# Altium PCB PCB1.PcbDoc
Units mm, origin at the board's own origin, x right, y up, seen from the top; angles counter-clockwise.
Board outline 31.73 x 45.8 mm, 2 copper layers (Component Side, Bottom Layer), stack 1.571 mm thick; 19 components, 20 nets, 57 pads, 12 vias.
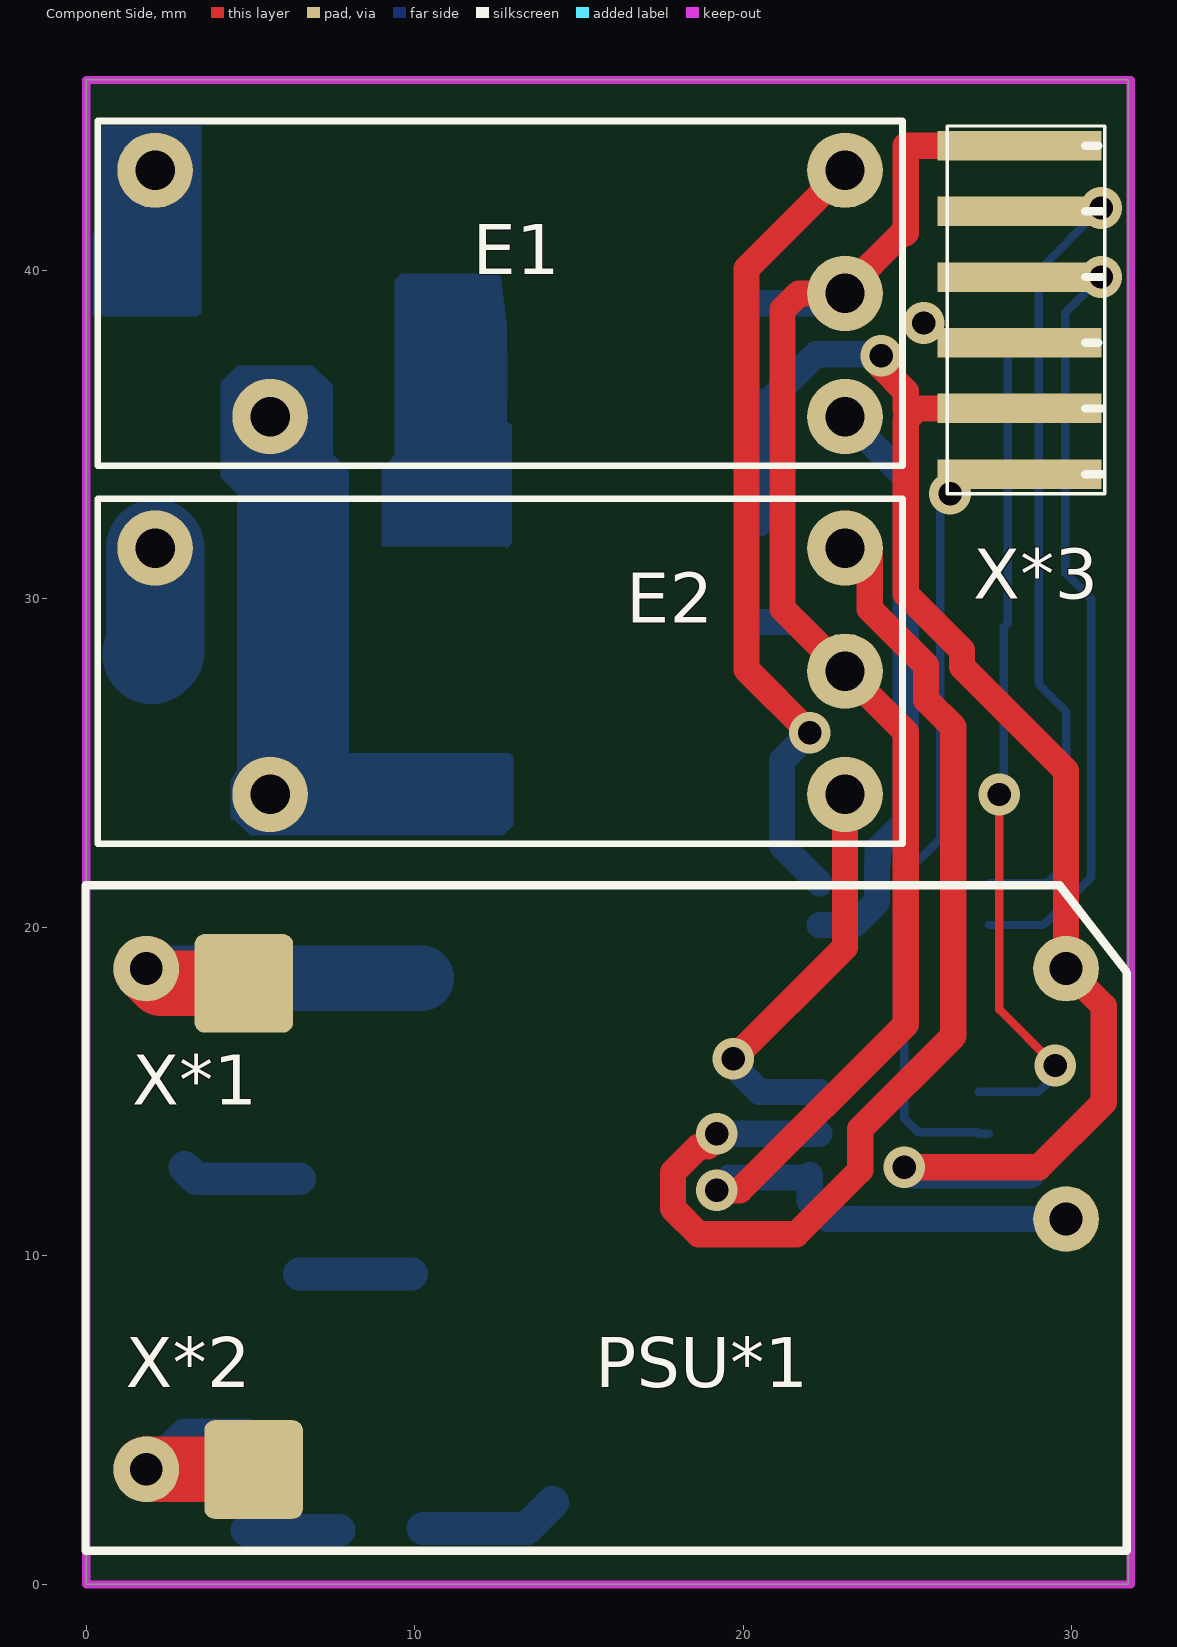
[diagram p0: Component Side view]
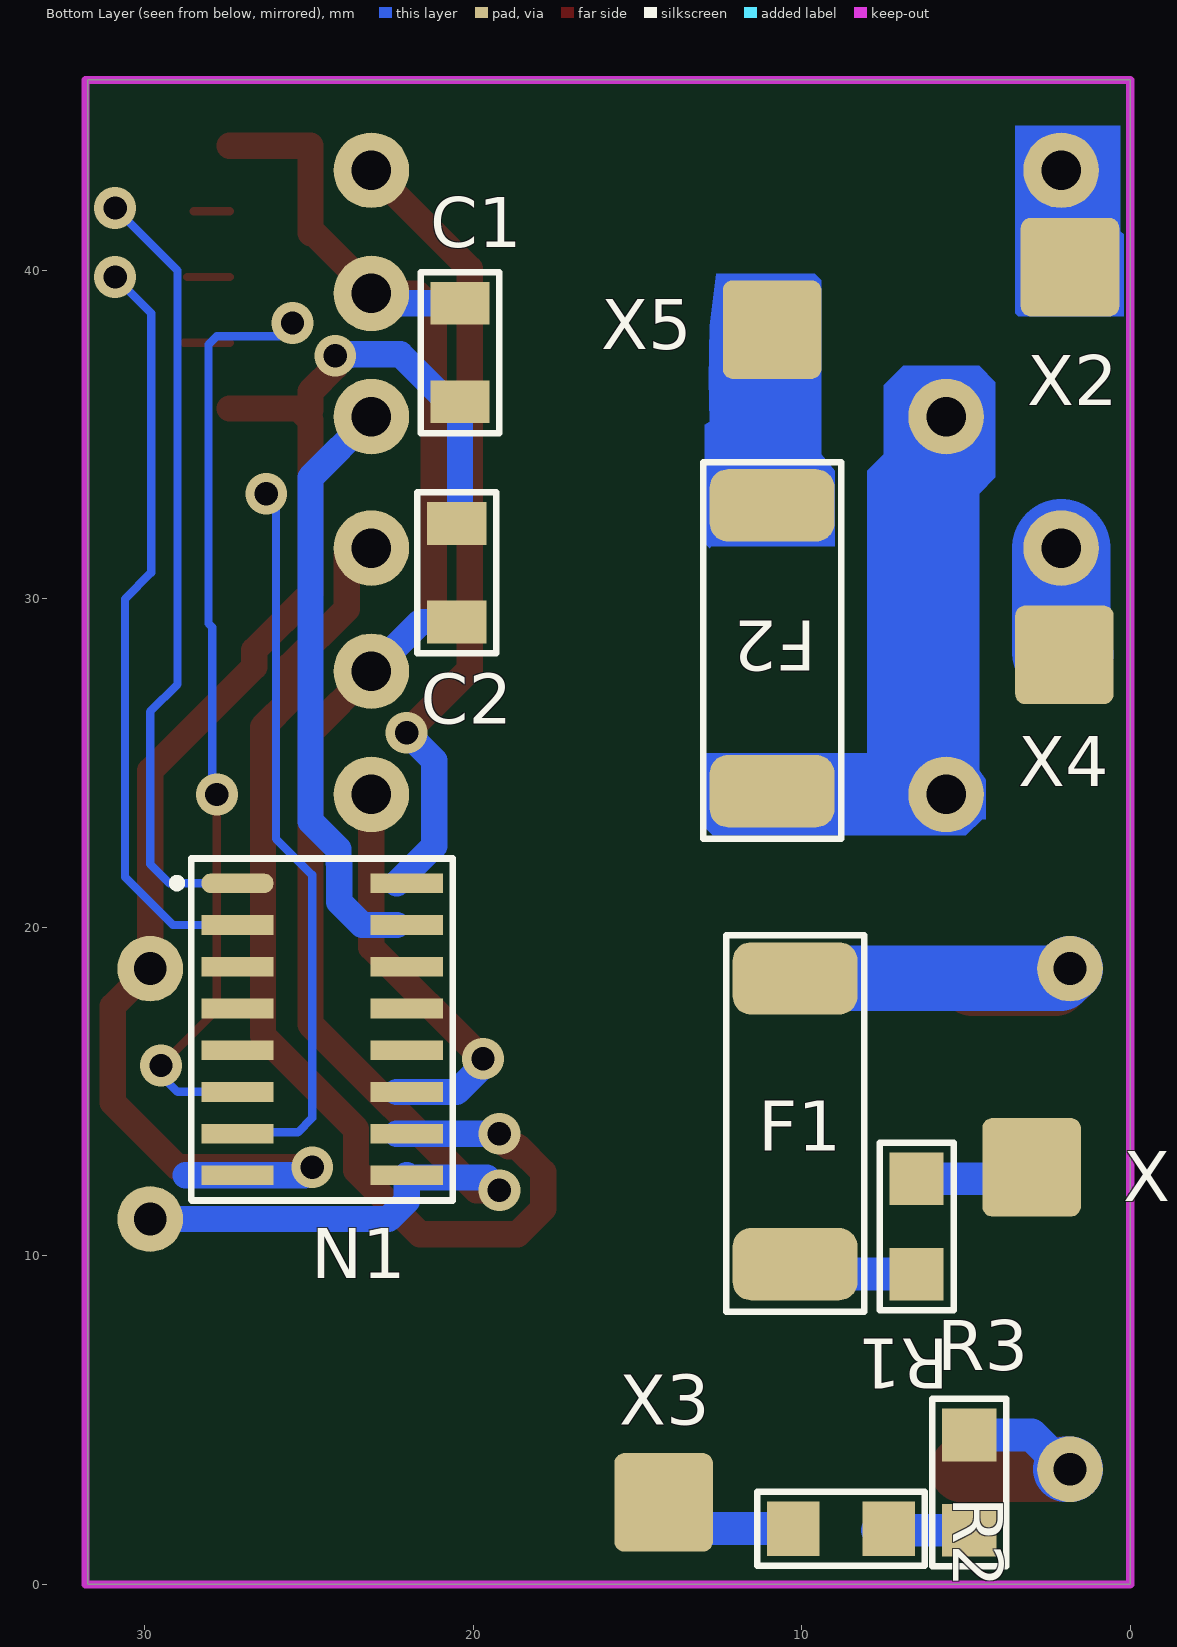
[diagram p1: Bottom Layer view, seen from below]
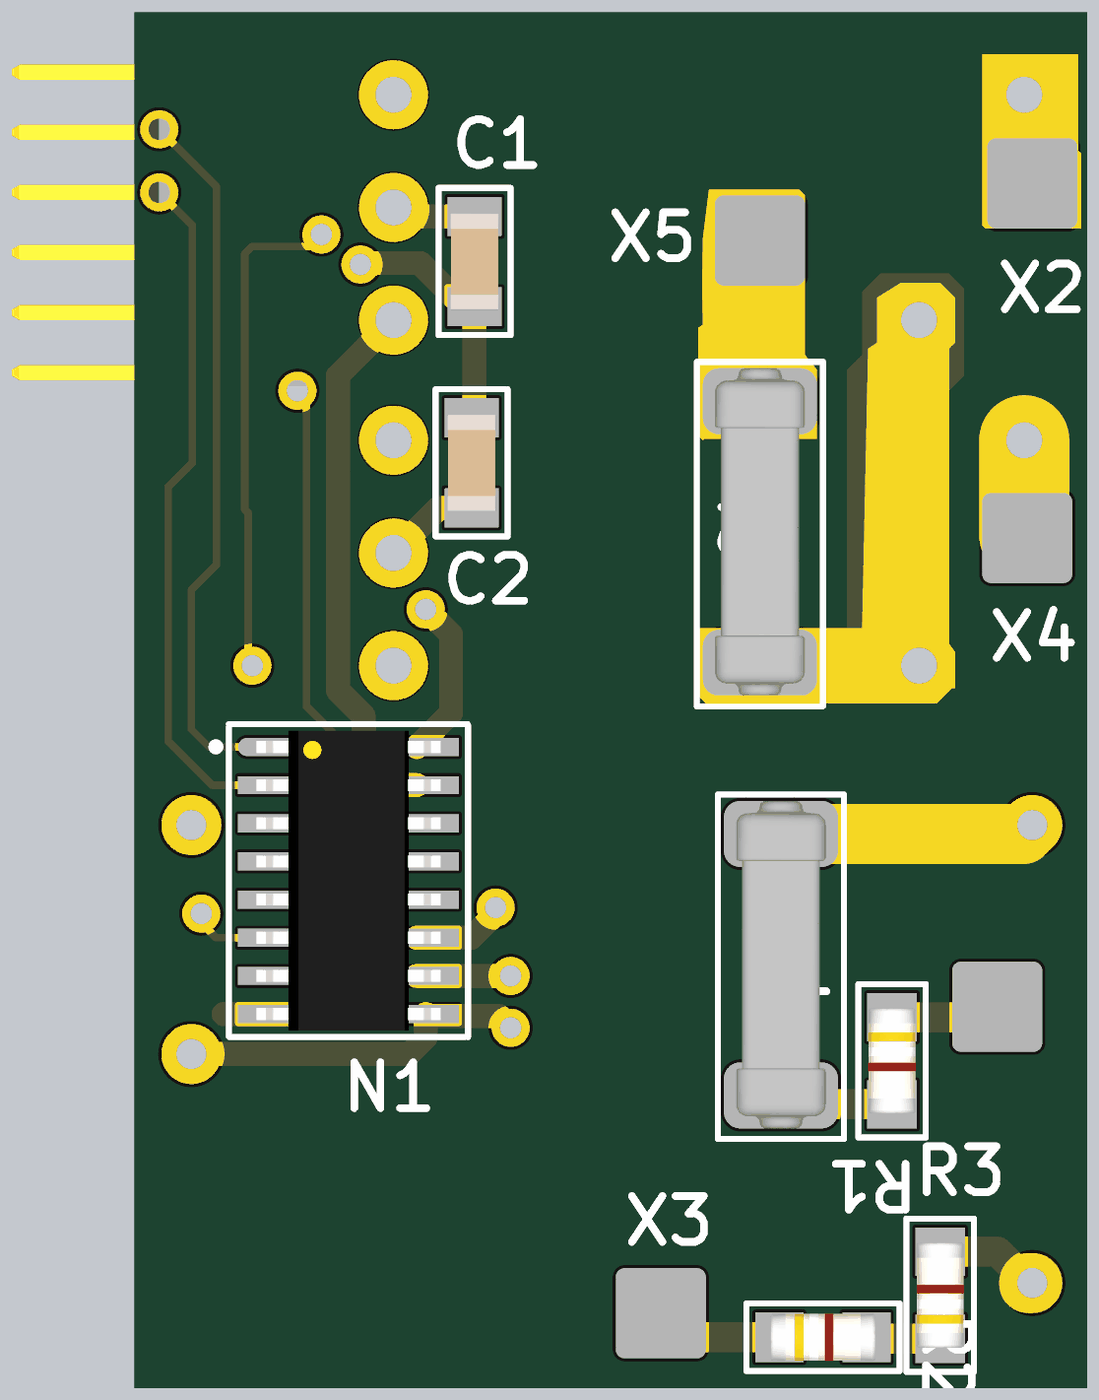
[diagram p2: 3D render of the assembled board from below, using the file's embedded part models]

## Layer stack, top to bottom
Top Solder: solder mask 0.0102, Solder Resist, Dk 3.5
Component Side: signal copper 0.0356
Dielectric 1: core 1.5, FR-4, Dk 4.2
Bottom Layer: signal copper 0.0356
Solder Side: solder mask 0.0187, Solder Resist, Dk 3.5

## Board outline
0,0 31.73,0 31.73,45.8 0,45.8

## Design rules (kind name [scope] priority, off if disabled: settings)
Clearance [All] p1: gap=0.3
PolygonConnect [All] p1: connectstyle=Relief reliefconductorwidth=0.254 reliefentries=4 polygonreliefangle="90 Angle" airgapwidth=0.254
RoomDefinition Sheet1 [InComponentClass('Sheet1')] p1: confinementstyle=ConfineIn formatcopy=TRUE lockcomponents=FALSE outline -55.589,-76.52 -4.789,-76.52 -4.789,-51.12 -55.589,-51.12
RoutingVias [All] p1: holewidth=0.6 width=1 viastyle="Through Hole" minholewidth=0.711 minwidth=1.27 maxholewidth=0.711 maxwidth=1.27
SolderMaskExpansion [All] p1: expansion=0.102
Width Width_1 [InNetClass('2mm')] p1: maxlimit=5 minlimit=1 preferedwidth=2
Width Width_2 [InNetClass('0.8mm')] p2: maxlimit=1 minlimit=0.5 preferedwidth=0.8
Width [All] p3: maxlimit=0.254 minlimit=0.254 preferedwidth=0.254
30 further rules are at their usual default settings.

## Classes and differential pairs
net class 0.8mm: 12V GND NetE1_1 NetE1_6 NetE2_1 NetE2_6
net class 2mm: NetE1_3 NetE1_5 NetE2_3 NetF1_1 NetF1_2 NetF2_2 NetPSU*1_2 NetR1_1 NetR2_1 NetR2_2

## Components (designator, comment, footprint, x,y, rotation, side; value= is the part's Value field where it differs from the comment)
C1 "10nF/500V" CAP_1206_IPC_B 20.4,37.5 r90 bottom
C2 "10nF/500V" CAP_1206_IPC_B 20.5,30.8 r270 bottom
E1 "ADW1212W" RELAIS_PANASONIC_ADW1212W 12.6,39.3 r180 top
E2 "ADW1212W" RELAIS_PANASONIC_ADW1212W 12.6,27.8 r180 top
F1 "1.25A/250V" Fuse 10.2,14.1 r90 bottom
F2 "1.25A/250V" Fuse 10.9,28.5 r90 bottom
N1 "ULN2003D" SOP127P720X175-16N 24.6,16.9 r180 bottom
PSU*1 "PSU Module" RAC02-GB 1.831,3.506 r0 top
R1 "1k/0.1%" RES_MiniMELF_3514N 6.5,10.9 r270 bottom
R2 "1k/0.1%" RES_MiniMELF_3514N 8.8,1.7 r180 bottom
R3 "1k/0.1%" RES_MiniMELF_3514N 4.9,3.1 r90 bottom
X1 "1 PIN" 1p 3,12.7 r180 bottom
X2 "1 PIN" 1p 1.831,40.1 r180 bottom
X3 "1 PIN" 1p 14.2,2.5 r180 bottom
X4 "1 PIN" 1p 2,28.3 r180 bottom
X5 "1 PIN" 1p 10.9,38.2 r180 bottom
X*1 "1 PIN" 1p 4.8,18.3 r0 top
X*2 "1 PIN" 1p 5.1,3.5 r0 top
X*3 "1x6p" M22-5330605 27.41,33.8 r90 top locked

## Footprints (in the part's own frame and the unit in brackets; to place one, negate y for a bottom-side part, rotate by r counter-clockwise, add the part's x,y. Pads: shape width x height; smd on the part's side, far side on the other; paste and mask are expansions set on the pad)
1p [mm]
  rrect20% 3x3 smd: 1(0,0)
CAP_1206_IPC_B [mm]
  rect 1.3x1.8 smd: 1(-1.5,0) 2(1.5,0)
  silkscreen extent -2.45,-1.2 2.45,1.2, body extent -2.15,-0.9 2.15,0.9, height 0.79
Fuse [mm]
  rrect50% 2.2x3.8 smd: 1(-4.35,0) 2(4.35,0)
  silkscreen extent -5.8,-2.1 5.66,2.1, body extent -5.45,-1.5 5.45,1.5, height 3
M22-5330605 [mm]
  rect 0.9x5 smd: 1(0,-1) 2(2,-1) 3(4,-1) 4(6,-1) 5(8,-1) 6(10,-1)
  silkscreen extent -0.6,-3.6 10.6,1.2, body extent -1,-8.4 11,0.6, height 2
RAC02-GB [mm]
  round 2 hole 1: 1(0,15.24) 2(0,0) 3(28,15.24) 4(28,7.62)
  silkscreen extent -1.85,-2.48 29.85,17.78
RELAIS_PANASONIC_ADW1212W [mm]
  round 2.3 hole 1.2 paste-127 mask+0.05: 1(-10.5,-3.75) 3(10.5,-3.75) 5(7,3.75) 6(-10.5,3.75) 7(-10.5,0)
  silkscreen extent -12.25,-5.25 12.25,5.25, body extent -12,-5 12,5, height 18.8
RES_MiniMELF_3514N [mm]
  rect 1.6x1.65 smd: 1(-1.45,0) 2(1.45,0)
  silkscreen extent -2.55,-1.12 2.55,1.12, body extent -2.25,-0.82 2.25,0.82, height 1.55
SOP127P720X175-16N [mm]
  oval 2.2x0.6 smd: 1(-2.575,4.445)
  rect 2.2x0.6 smd: 2(-2.575,3.175) 3(-2.575,1.905) 4(-2.575,0.635) 5(-2.575,-0.635) 6(-2.575,-1.905) 7(-2.575,-3.175) 8(-2.575,-4.445) 9(2.575,-4.445) 10(2.575,-3.175) 11(2.575,-1.905) 12(2.575,-0.635) 13(2.575,0.635) 14(2.575,1.905) 15(2.575,3.175) 16(2.575,4.445)
  silkscreen extent -4.54,-5.21 3.98,5.2, body extent -3.67,-4.98 3.67,4.99, height 1.78

## Part data
C1 C2: library part 10nF_500V_1206_02-1257, "02-1257 - SMD Capacitor 1206 10nF 500V X7R"
E1 E2: library part ADW1212W_04-3960, "04-3960 - Relais, 12V, 1S 2Coils"
F1 F2: library part Fuse_1.25A_250V_04-3586, "04-3586 - Fuse 1.25A 250V THT 8.4x4mm RM5.08mm"
N1: library part ULN2003D_11-0373, "11-0373- High-Voltage, High-Current Darlington Transistor Arrays, SOP16"
PSU*1: "SMPS PCB Mode"
R1 R2 R3: library part 1k_MiniMelf_01-3006, "01-3006 - SMD Resistor MiniMelf 0.25W 0.1%"

## Via types
v1: diameter 1.27, hole 0.711, Component Side to Bottom Layer, 12 vias

## Nets (pads, with @x,y where several pads share a name; then routed paths per layer and width w, separated by ;. In a path a pad name is that pad's centre, name@x,y a point inside that pad or via, vN(x,y) a via of type N, cw(c..) or ccw(c..) an arc to the next point about the centre after c; other vN are vias at no path point)
12V: C1.2 C2.2 E1.7 E2.7 N1.9 PSU*1.4 X*3.6 | length 58.9
  Component Side w0.8: v1(19.2,12) 19.9,12 24.95,17.05 24.95,25.95 E2.7 21.2,29.7 21.2,38.8 21.7,39.3 E1.7 23.1,39.388 24.847,41.135 24.935,41.135 24.95,41.15 24.95,43.8 X*3.6@27.41,43.8
  Bottom Layer w0.8: v1(19.2,12) 19.59,12.39 N1.9@22.025,12.39 ; C1.2 22.8,39 E1.7 ; C2.2 21.6,29.3 E2.7 ; N1.9 N1.9@22.025,12.39 ; PSU*1.4 22.574,11.126 22.025,11.675 N1.9@22.025,12.39
DOWNCLOSE: N1.6 X*3.3 | length 29.8
  Component Side w0.254: X*3.3@27.41,37.8 X*3.3 X*3.3@28.8,37.8 ; v1(27.8,24.05) 27.8,17.5 v1(29.5,15.8)
  Bottom Layer w0.254: v1(25.5,38.4) 25.9,38 27.8,38 28.054,37.746 28.054,29.254 27.938,29.138 27.938,24.188 v1(27.8,24.05) ; N1.6 28.995,14.995 29.5,15.5 v1(29.5,15.8)
DOWNOPEN: N1.7 X*3.1 | length 22.4
  Bottom Layer w0.254: v1(26.3,33.2) 26,32.9 26,22.7 24.9,21.6 24.9,14.2 25.338,13.762 27.138,13.762 N1.7 N1.7@27.475,13.725
GND: C1.1 C2.1 N1.8 PSU*1.3 X*3.2 | length 47.2
  Component Side w0.8: v1(24.2,37.4) 24.2,37.066 24.95,36.316 24.95,35.75 25.1,35.6 ; v1(24.9,12.7) 29.001,12.7 30.973,14.672 30.973,17.604 PSU*1.3 29.831,24.769 26.665,27.935 26.665,28.435 24.95,30.15 24.95,35.45 25.1,35.6 ; X*3.2@27.41,35.8 25.3,35.8 25.1,35.6
  Bottom Layer w0.8: C2.1 20.4,32.4 C1.1 20.77,36 22.22,37.45 23.866,37.45 23.816,37.4 v1(24.2,37.4) ; v1(24.9,12.7) 25.145,12.455 28.755,12.455
NetE1_1: E1.1 N1.16 | length 24.6
  Component Side w0.8: v1(22.026,25.925) 20.1,27.851 20.1,40.05 E1.1
  Bottom Layer w0.8: v1(22.026,25.925) 21.185,25.084 21.185,22.485 N1.16@22.325,21.345
NetE1_3: E1.3 X2.1 | length 3.1
  Bottom Layer w2: X2.1 2.1,40.369 E1.3
NetE1_5: E1.5 E2.5 F2.1 | length 17.3
  Bottom Layer w2: E2.5 E2.5@5.7,24.15 ; E1.5 5.6,33.9 6.3,33.2 6.3,24.75 E2.5@5.7,24.15 ; F2.1 E2.5@5.7,24.15
NetE1_6: E1.6 N1.15 | length 17.9
  Bottom Layer w0.8: N1.15@22.325,20.075 23.375,20.075 24.073,20.773 24.073,21.943 24.1,21.97 24.1,22.384 24.95,23.234 24.95,33.7 E1.6
NetE2_1: E2.1 N1.10 | length 35.1
  Component Side w0.8: v1(19.2,13.725) 19.2,13.612 18.923,13.335 18.647,13.335 17.865,12.553 17.865,11.447 18.647,10.665 21.621,10.665 23.565,12.609 23.565,13.865 26.4,16.7 26.4,26.1 25.565,26.935 25.565,27.979 23.85,29.694 23.85,31.35 23.65,31.55 E2.1 E2.1@22.738,31.55
  Bottom Layer w0.8: v1(19.2,13.725) N1.10@22.325,13.725
NetE2_3: E2.3 X4.1 | length 3.3
  Bottom Layer w3: X4.1 2.1,28.4 E2.3
NetE2_6: E2.6 N1.11 | length 12.6
  Component Side w0.8: v1(19.7,16) 23.1,19.4 E2.6
  Bottom Layer w0.8: v1(19.7,16) 19.7,15.8 20.505,14.995 N1.11@22.325,14.995
NetF1_1: F1.1 R1.2 | length 3.4
  Bottom Layer w1: R1.2 F1.1@9.9,9.45
NetF1_2: F1.2 PSU*1.1 X*1.1 | length 11.6
  Component Side w2: PSU*1.1 2.277,18.3 X*1.1
  Bottom Layer w2: PSU*1.1 2.127,18.45 F1.2
NetF2_2: F2.2 X5.1 | length 5.3
  Bottom Layer w2: F2.2 X5.1
NetPSU*1_2: PSU*1.2 R3.2 X*2.1 | length 6.8
  Component Side w2: PSU*1.2 5.094,3.506 X*2.1
  Bottom Layer w1: PSU*1.2@1.956,3.506 3,4.55 R3.2
  Bottom Layer w2: PSU*1.2 PSU*1.2@1.956,3.506
NetR1_1: R1.1 X1.1 | length 3.6
  Bottom Layer w1: X1.1 3.35,12.35 R1.1
NetR2_1: R2.1 X3.1 | length 4.3
  Bottom Layer w1: R2.1 13.4,1.7 X3.1
NetR2_2: R2.2 R3.1 | length 2.8
  Bottom Layer w1: R3.1 R2.2@7.7,1.65
UPCLOSE: N1.2 X*3.4 | length 24.1
  Component Side w0.254: X*3.4@27.41,39.8 X*3.4@28.7,39.8
  Bottom Layer w0.254: N1.2@27.475,20.075 29.142,20.075 30.6,21.533 30.6,30 29.8,30.8 29.8,38.7 v1(30.9,39.8)
UPOPEN: N1.1 X*3.5 | length 24.8
  Component Side w0.254: X*3.5@27.41,41.8 X*3.5@28.5,41.8
  Bottom Layer w0.254: N1.1@27.475,21.345 29.245,21.345 29.831,21.931 29.831,26.569 29,27.4 29,40 v1(30.9,41.9)
pads on no net: N1.3 N1.4 N1.5 N1.12 N1.13 N1.14

## Keep-outs
Keep-Out Layer:
  lines w0.254: 0,0 0,45.8 31.8,45.8 31.8,0 0,0

## Other copper
Bottom Layer:
  region net NetF2_2: 9,33.9 9.4,34.3 9.4,39.7 9.6,39.9 12.6,39.9 12.8,38.3 12.825,36.675 12.8,35.4 12.95,35.3 12.95,34.1 12.95,31.7 12.8,31.55 12.75,31.6 9,31.6 9,33.9 9.4,34.3 9.4,34.4
  region net NetE1_5: 4.4,23.3 4.5,23.3 5,22.8 12.7,22.8 13,23.1 13,25.2 12.9,25.3 8,25.3 8,33.9 7.5,34.4 7.5,36.5 6.9,37.1 4.6,37.1 4.1,36.6 4.1,33.7 4.6,33.2 4.6,24.78 4.4,24.5
  region net NetF2_2: 9,33.9 9.4,34.3 9.4,39.7 9.6,39.9 12.6,39.9 12.8,38.3 12.825,36.675 12.8,35.4 12.95,35.3 12.95,34.1 12.95,31.7 12.8,31.55 12.75,31.6 9,31.6 9,33.9 9.4,34.3 9.4,34.4
  region net NetE1_3: 0.3,41.2 0.3,44.4 3.5,44.4 3.5,44.3 3.5,44.1 3.5,38.8 3.5,38.7 3.4,38.6 0.2,38.6 0.2,41.1

## Silkscreen, mask and mechanical layers (free items; w line width, h text height)
Solder Side:
  region: 4.4,23.3 4.5,23.3 5,22.8 12.7,22.8 13,23.1 13,25.2 12.9,25.3 7.5,25.3 7.3,34.6 7,34.8 7,35.55 7,36.3 6.2,36.8 4.9,36.8 4.4,36.3 4.4,34.8 4.6,34.6 4.6,24.78 4.4,24.5
  region: 9,33.9 9.4,34.3 9.4,39.7 9.6,39.9 12.6,39.9 12.8,38.3 12.825,36.675 12.8,35.4 12.95,35.3 12.95,34.1 12.95,31.7 12.8,31.55 12.75,31.6 9,31.6 9,33.9 9.4,34.3 9.4,34.4
  region: 0.3,41.2 0.3,44.4 3.5,44.4 3.5,44.3 3.5,44.1 3.5,38.8 3.5,38.7 3.4,38.6 0.2,38.6 0.2,41.1
  lines w2: 2.127,18.45 10.2,18.45
  lines w3: 2.1,28.4 2.1,31.55
Drill Drawing:
  text ".LEGEND" at 39.291,4.76 h1.52
  text "Drill Drawing." at 39.291,2.22 h1.52